# Altium PCB ArduinoUno-Template.PcbDoc
Units mm, origin at the board's own origin, x right, y up, seen from the top; angles counter-clockwise.
Board outline 68.83 x 53.59 mm, 2 copper layers (Top Layer, Bottom Layer), stack 1.671 mm thick; 5 components, 26 nets, 34 pads, 0 vias.
Unrouted connection lines stored in the file: 4.
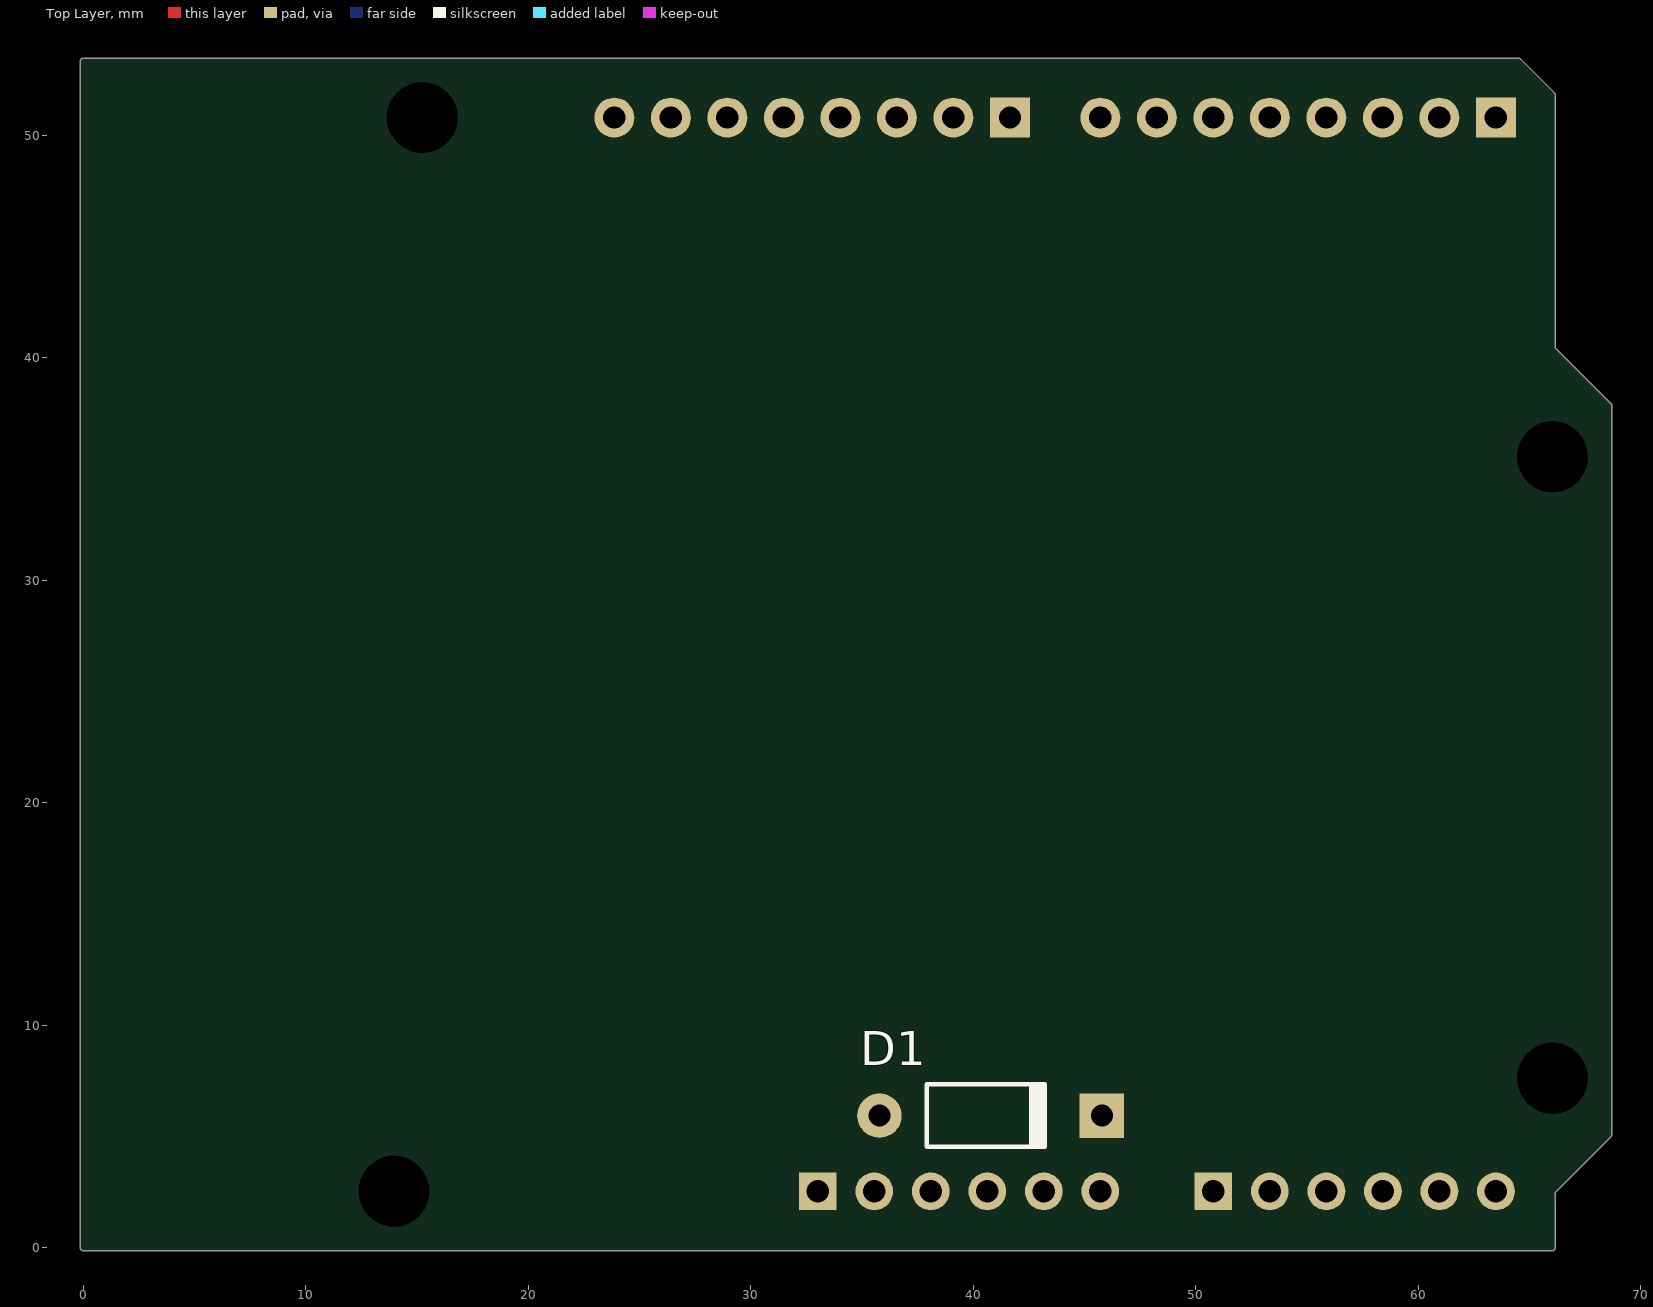
[diagram p0: Top Layer view]
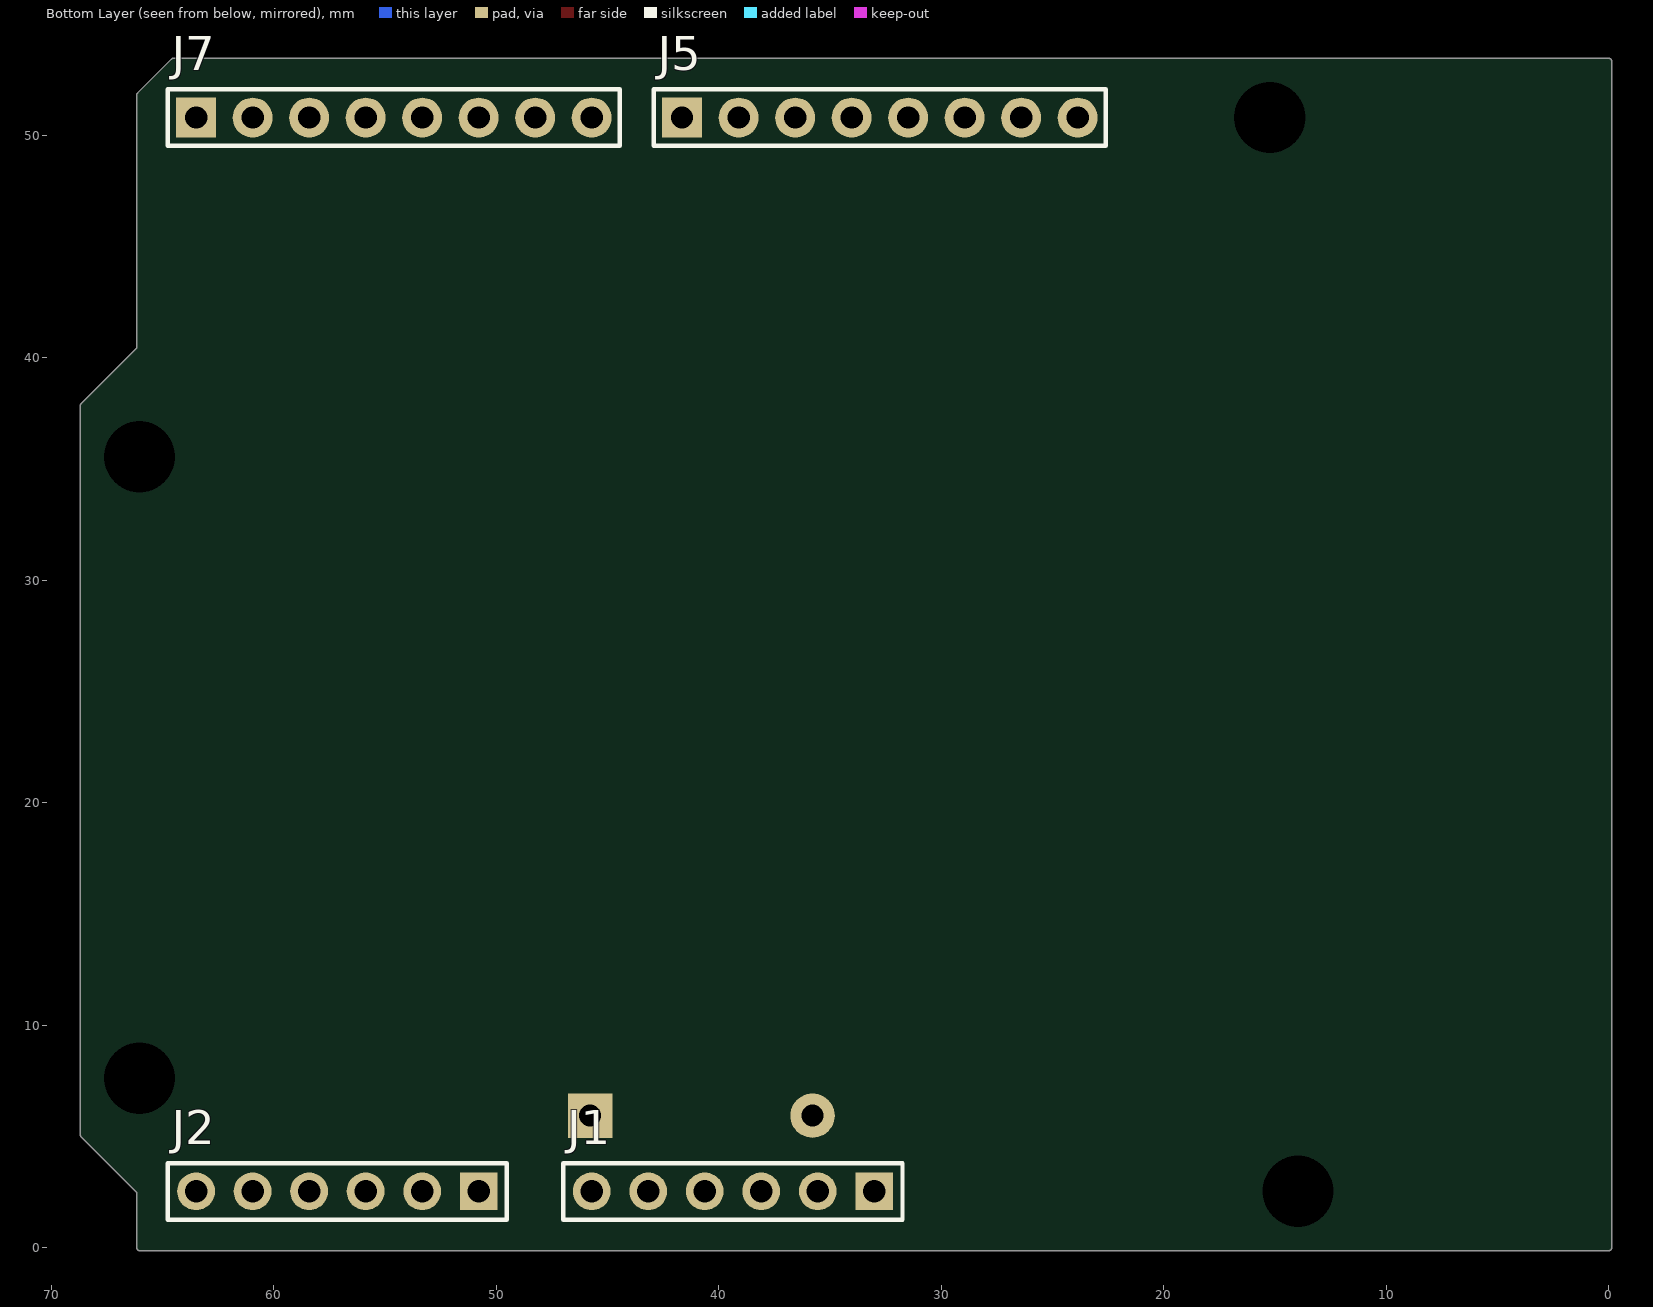
[diagram p1: Bottom Layer view, seen from below]

## Layer stack, top to bottom
Top Layer: signal copper 0.0356
Dielectric: core 1.6, FR-4, Dk 4.8
Bottom Layer: signal copper 0.0356

## Board outline
0,-0.127 66.04,-0.127 ccw(c66.04,0) 66.167,0 66.167,2.487 68.67,4.989 ccw(c68.58,5.08) 68.707,5.08 68.707,37.846 cw(c68.644,37.846) 68.707,37.845 ccw(c68.58,37.846) 68.707,37.846 ccw(c68.58,37.846) 68.67,37.937 68.67,37.936 66.167,40.439 66.167,51.816 cw(c66.104,51.816) 66.167,51.815 ccw(c66.04,51.816) 66.167,51.816 ccw(c66.04,51.816) 66.13,51.907 66.13,51.906 64.606,53.43 64.607,53.43 ccw(c64.516,53.34) 64.516,53.467 ccw(c64.516,53.404) 64.515,53.467 cw(c64.516,53.34) 64.516,53.467 0,53.467 ccw(c0,53.34) -0.127,53.34 -0.127,0 ccw(c0,0)

## Design rules (kind name [scope] priority, off if disabled: settings)
Clearance [All] p1: gap=0.254
PolygonConnect [All] p1: connectstyle=Relief reliefconductorwidth=0.254 reliefentries=4 polygonreliefangle="90 Angle"
RoutingVias [All] p1: holewidth=0.711 width=1.27 viastyle="Through Hole" minholewidth=0.711 minwidth=1.27 maxholewidth=0.711 maxwidth=1.27
SilkscreenOverComponentPads [All] p1: minsilkscreentomaskgap=0.254
SolderMaskExpansion [All] p1: expansion=0.102
Width [All] p1: maxlimit=0.254 minlimit=0.254 preferedwidth=0.254
27 further rules are at their usual default settings.

## Components (designator, comment, footprint, x,y, rotation, side; value= is the part's Value field where it differs from the comment)
D1 "DIO1N4007" DO-41 40.564,5.944 r0 top
J1 "CNHDR036M3-1/6" J_HDR1X6 33.02,2.54 r0 bottom locked
J2 "CNHDR036M3-1/6" J_HDR1X6 50.8,2.54 r0 bottom locked
J5 "CNHDR036M3-1/8" J_HDR1X8 41.656,50.8 r180 bottom locked
J7 "CNHDR036M3-1/8" J_HDR1X8 63.5,50.8 r180 bottom locked

## Footprints (in the part's own frame and the unit in brackets; to place one, negate y for a bottom-side part, rotate by r counter-clockwise, add the part's x,y. Pads: shape width x height; smd on the part's side, far side on the other; paste and mask are expansions set on the pad)
DO-41 [mm] "Diode, Axial; Body 5.2 x 2.7 mm (LxDia. max), Lead Dia. 0.86 mm (max)"
  round 2 hole 1: 1(-4.77,0)
  rect 2x2 hole 1: 2(5.23,0)
  silkscreen extent -2.65,-1.4 2.75,1.4, body extent -5.2,-1.36 5.66,1.36, height 2.72
J_HDR1X6 [mm] "Connector; Header; 6 Position"
  rect 1.7x1.7 hole 1: 1(0,0)
  round 1.7 hole 1: 2(2.54,0) 3(5.08,0) 4(7.62,0) 5(10.16,0) 6(12.7,0)
  silkscreen extent -1.27,-1.27 13.97,1.27, body extent -1.27,-1.27 13.97,1.27, height 9.26
J_HDR1X8 [mm] "Connector; Header; 8 Position"
  rect 1.8x1.8 hole 1: 1(0,0)
  round 1.8 hole 1: 2(2.54,0) 3(5.08,0) 4(7.62,0) 5(10.16,0) 6(12.7,0) 7(15.24,0) 8(17.78,0)
  silkscreen extent -1.27,-1.27 19.05,1.27, body extent -1.27,-1.27 19.05,1.27, height 9.26

## Part data
D1: "1 Amp General Purpose Rectifier"
J1 J2 J5 J7: "*"

## Free pads (board coordinates)
  round 0 hole 3.2 unplated: 0(13.97,2.54) 0(15.24,50.8) 0(66.04,7.62) 0(66.04,35.56)

## Nets (pads, with @x,y where several pads share a name; then routed paths per layer and width w, separated by ;. In a path a pad name is that pad's centre, name@x,y a point inside that pad or via, vN(x,y) a via of type N, cw(c..) or ccw(c..) an arc to the next point about the centre after c; other vN are vias at no path point)
AIN0: J2.1
AIN1: J2.2
AIN2: J2.3
AIN3: J2.4
AIN4: J2.5
AIN5: J2.6
NetD1_1: D1.1 J1.3
NetD1_2: D1.2 J1.6
NetJ1_1: J1.1
NetJ1_2: J1.2
NetJ1_4: J1.4 J1.5 J5.7
NetJ5_1: J5.1
NetJ5_2: J5.2
NetJ5_3: J5.3
NetJ5_4: J5.4
NetJ5_5: J5.5
NetJ5_6: J5.6
NetJ5_8: J5.8
NetJ7_1: J7.1
NetJ7_2: J7.2
NetJ7_3: J7.3
NetJ7_4: J7.4
NetJ7_5: J7.5
NetJ7_6: J7.6
NetJ7_7: J7.7
NetJ7_8: J7.8

## Silkscreen, mask and mechanical layers (free items; w line width, h text height)
PcbOutline:
  lines w0.254: 0,0 66.04,0 66.04,2.54 68.58,5.08 68.58,37.846 66.04,40.386 66.04,51.816 64.516,53.34 0,53.34 0,0
Mechanical 16:
  drawing of 4360 lines, arcs and shapes, not listed
  text "A" at 118.275,93.993 h1.78 r90
  text "D" at -25.235,92.723 h1.78 r270
  text "C" at 22.39,92.723 h1.78 r270
  text "B" at 68.11,92.723 h1.78 r270
  text "2" at -46.825,59.068 h1.78 r90
  text "2" at 141.135,59.068 h1.78 r90
  text "1" at -46.825,-13.322 h1.78 r90
  text "1" at 141.135,-13.322 h1.78 r90
  text "ENGINEER:" at 24.676,-16.955 h1.14
  text "TITLE:" at 62.776,-16.955 h1.14
  text ".ProjectName" at 70.015,-23.559 h2.5
  text "PCB DESIGNER:" at 24.676,-24.448 h1.14
  text ".DrawnByX" at 38.9,-27.496 h2.5
  text "DATE:" at 24.676,-32.195 h1.14
  text "PART NO.:" at 62.776,-32.195 h1.14
  text "REV:" at 116.116,-32.195 h1.14
  text ".PRINT_DATE" at 25.946,-35.243 h1.78
  text ".RevisionNR" at 117.081,-36.64 h2.5
  text "FILE NAME:" at 24.676,-39.815 h1.14
  text "DWG NO:" at 62.776,-39.815 h1.14
  text "SCALE:" at 116.116,-39.815 h1.14
  text ".PCB_FILE_NAME_NO_PATH" at 25.946,-42.863 h1.78
  text ".PCB_Nr" at 70.65,-43.167 h2.5
  text "D" at -28.232,-48.095 h1.78 r270
  text "C" at 19.774,-48.095 h1.78 r270
  text "B" at 68.288,-48.095 h1.78 r270
  text "A" at 118.275,-48.247 h1.78 r90
Mechanical 17:
  drawing of 4360 lines, arcs and shapes, not listed
  text "A" at -25.743,93.993 h1.78 r270
  text "B" at 24.422,92.723 h1.78 r90
  text "C" at 70.142,92.723 h1.78 r90
  text "D" at 117.767,92.723 h1.78 r90
  text "2" at -48.603,59.068 h1.78 r270
  text "2" at 139.357,59.068 h1.78 r270
  text "1" at -48.603,-13.322 h1.78 r270
  text "1" at 139.357,-13.322 h1.78 r270
  text "TITLE:" at 29.756,-16.955 h1.14
  text "ENGINEER:" at 67.856,-16.955 h1.14
  text ".ProjectName" at 22.517,-23.559 h2.5
  text "PCB DESIGNER:" at 67.856,-24.448 h1.14
  text ".DrawnByX" at 54.14,-27.292 h2.5
  text "REV:" at -23.584,-32.195 h1.14
  text "PART NO.:" at 29.756,-32.195 h1.14
  text "DATE:" at 67.856,-32.195 h1.14
  text ".PRINT_DATE" at 66.586,-35.243 h1.78
  text ".RevisionNR" at -24.549,-36.64 h2.5
  text "SCALE:" at -23.584,-39.815 h1.14
  text "DWG NO:" at 29.756,-39.815 h1.14
  text "FILE NAME:" at 67.856,-39.815 h1.14
  text ".PCB_FILE_NAME_NO_PATH" at 66.586,-42.863 h1.78
  text ".PCB_Nr" at 21.882,-43.167 h2.5
  text "B" at 24.244,-48.095 h1.78 r90
  text "C" at 72.758,-48.095 h1.78 r90
  text "D" at 120.764,-48.095 h1.78 r90
  text "A" at -25.743,-48.247 h1.78 r270